# Altium PCB PCB2.PcbDoc
Units mil, origin at the board's own origin, x right, y up, seen from the top; angles counter-clockwise.
Board outline 6000 x 4000 mil, 2 copper layers (Top Layer, Bottom Layer); 51 components, 51 nets, 248 pads, 14 vias.
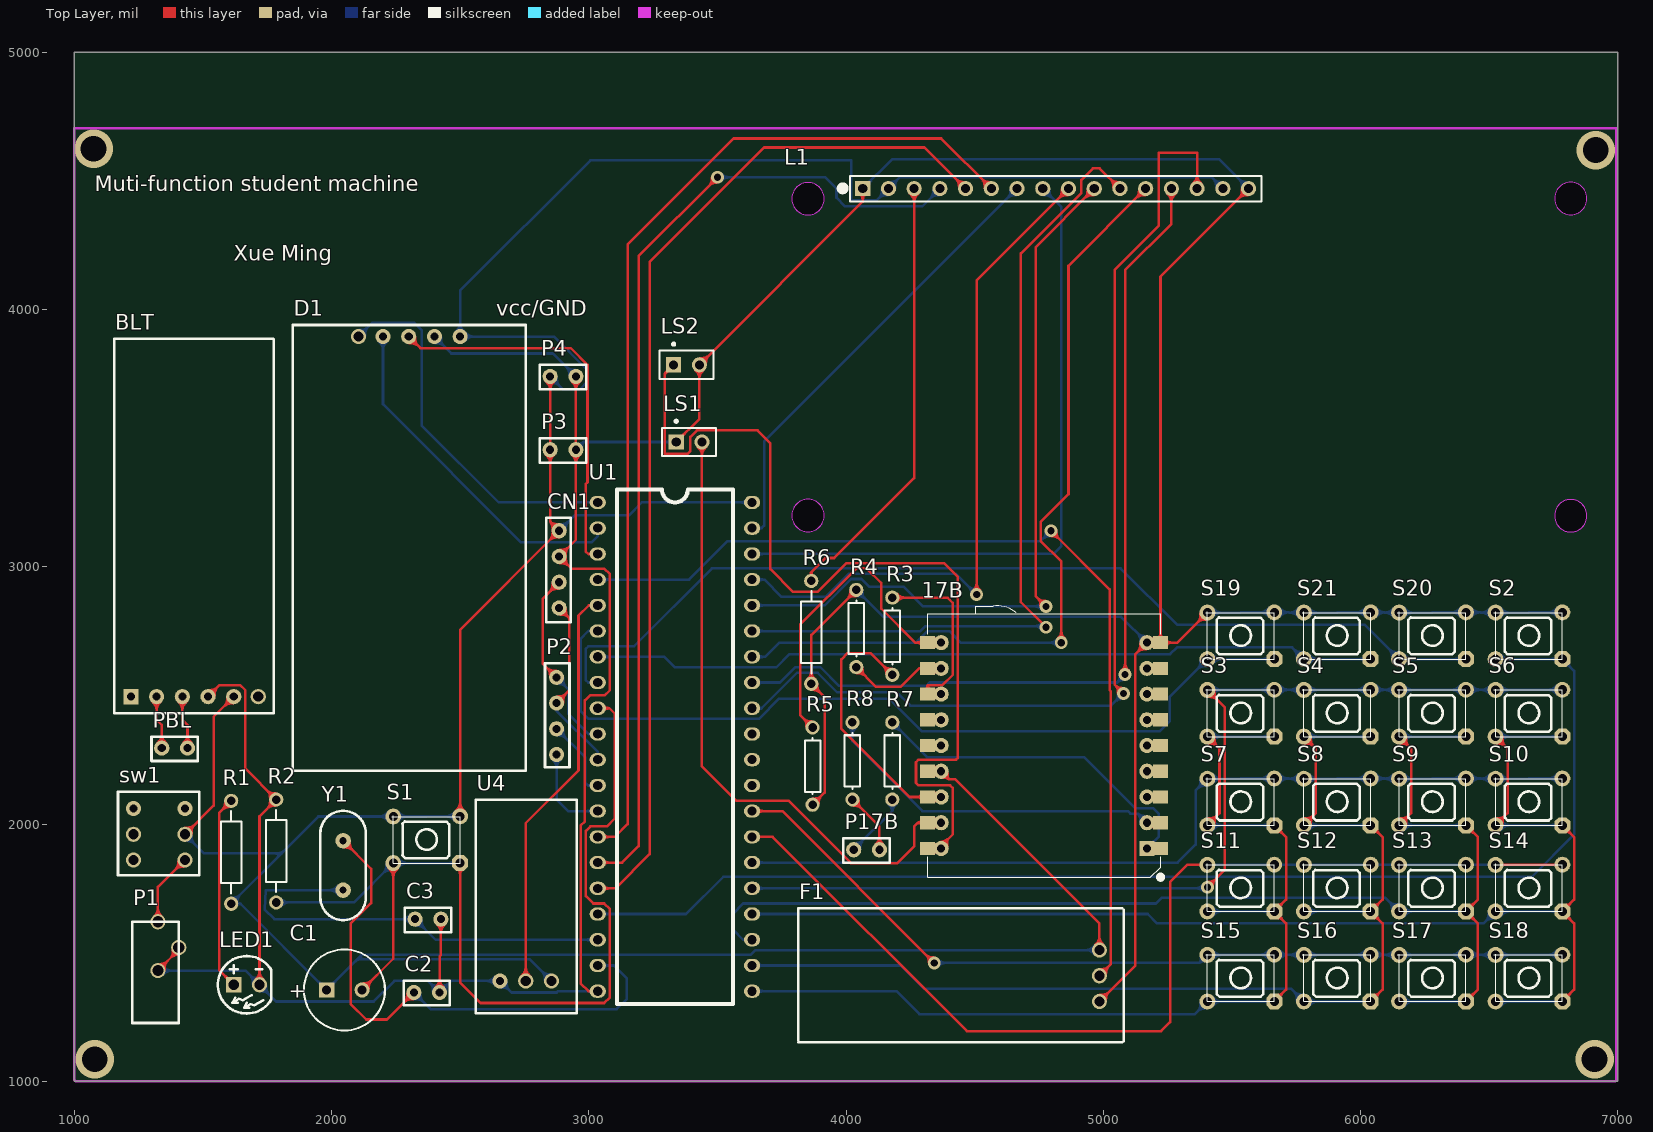
[diagram p0: Top Layer view]
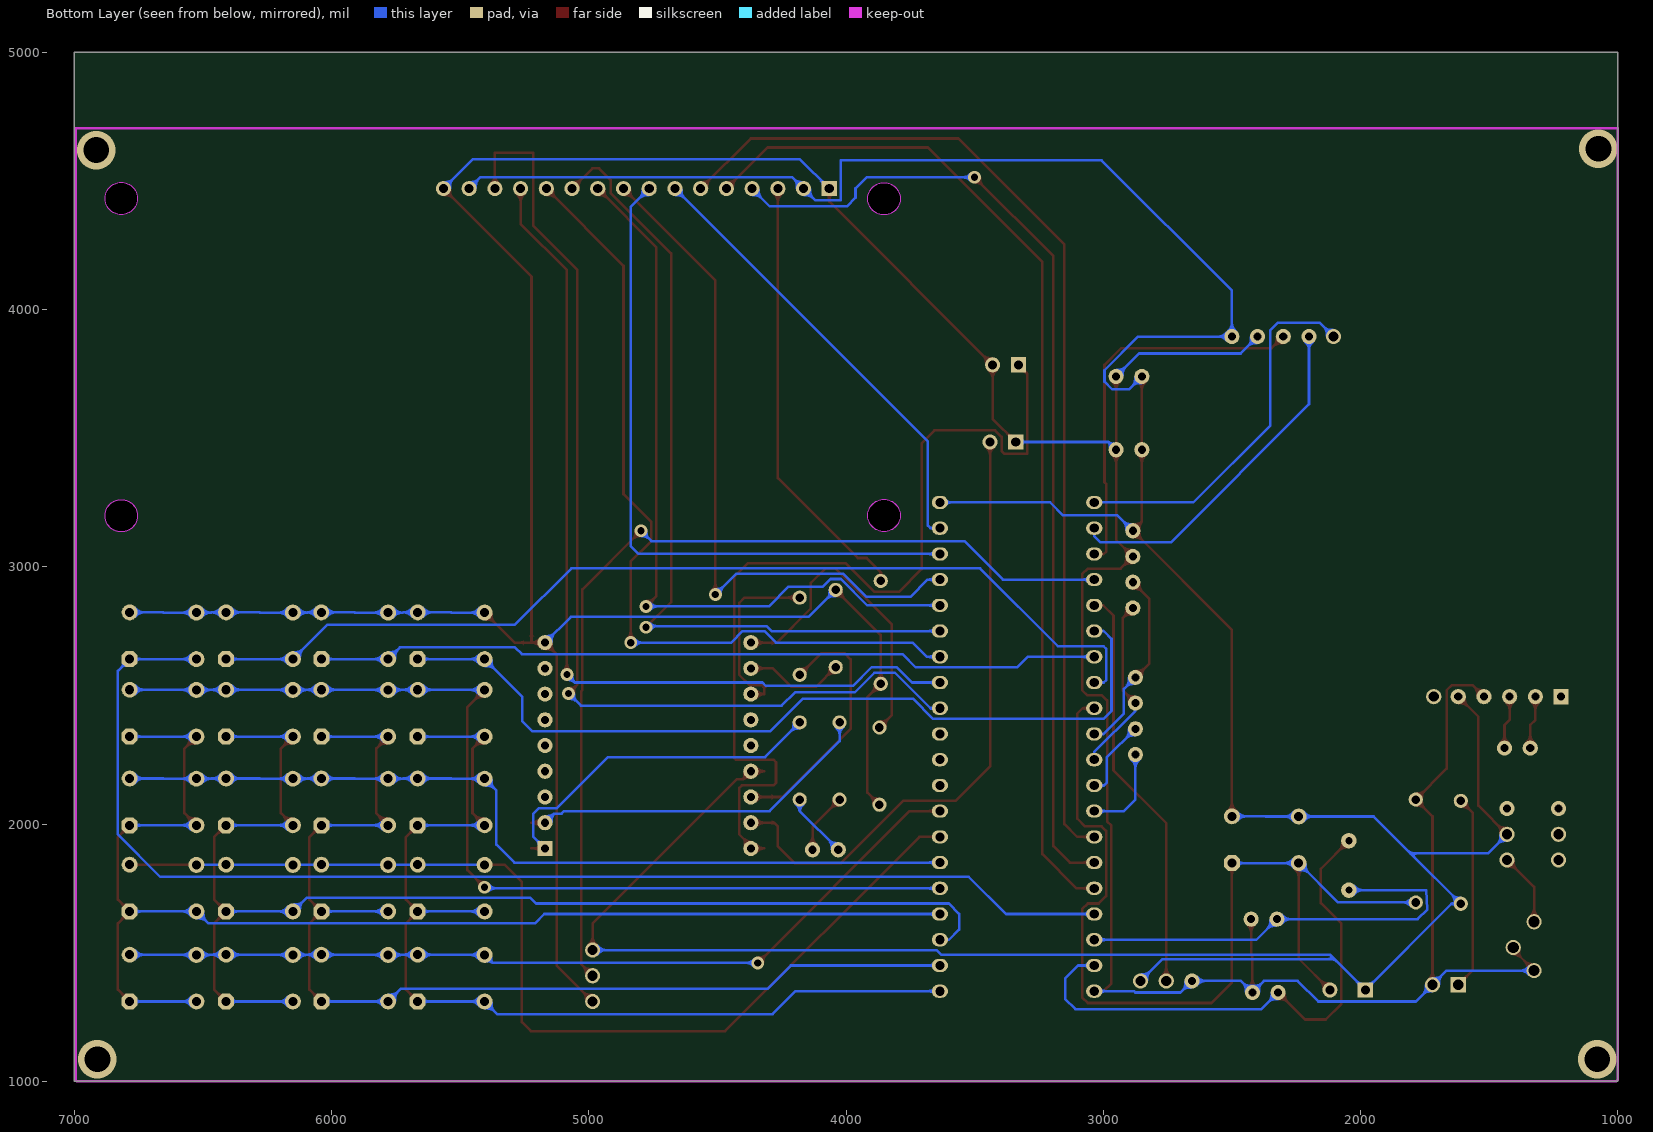
[diagram p1: Bottom Layer view, seen from below]

## Layer stack, top to bottom
Top Solder: solder mask 0.4, Solder Resist, Dk 3.5
Top Layer: signal copper 1.4
Dielectric 1: dielectric 12.6, FR-4, Dk 4.8
Bottom Layer: signal copper 1.4
Bottom Solder: solder mask 0.4, Solder Resist, Dk 3.5

## Board outline
1000,1000 7000,1000 7000,5000 1000,5000

## Design rules (kind name [scope] priority, off if disabled: settings)
Clearance [All] p1: gap=10 ignorepadtopadclearanceinfootprint=FALSE except(0: Arc-Hole Track-Hole SMDPad-Hole THPad-Hole Via-Hole Fill-Hole Poly-Hole Region-Hole Text-Hole)
PolygonConnect [All] p1: connectstyle=Relief reliefconductorwidth=10 reliefentries=4 polygonreliefangle="90 Angle" airgapwidth=10
RoutingVias [All] p1: holewidth=28 width=50 viastyle="Through Hole" minholewidth=28 minwidth=50 maxholewidth=28 maxwidth=50
SolderMaskExpansion [All] p1: expansion=4
Width [All] p1: maxlimit=10 minlimit=10 preferedwidth=10
30 further rules are at their usual default settings.

## Components (designator, comment, footprint, x,y, rotation, side; value= is the part's Value field where it differs from the comment)
17B "XY-V17B" 17B 5244.25,1776.81 r180 top
BLT "" BLE 1235,2495 r90 top
C1 "10uF" CAPPR3.5-8X12 2050,1355 r0 top
C2 "20pF" P4 2285,1345 r90 top value=104
C3 "20pF" P4 2290,1630 r90 top value=104
CN1 "4pin/2.54mm" CN1 2885,3180 r0 top
D1 "DS1302" DS1302 2755,3940 r270 top
F1 "蜂鸣器模块" BEEP 5024.25,1206.81 r180 top
L1 "LCD1602" LCD1602 4815,4470 r180 top
LED1 "直径5mm的红灯" LED_#5_Red 1670,1375 r0 top value=红灯
LS1 "Bell" PIN2 3340,3485 r0 top
LS2 "Bell" PIN2 3330,3785 r0 top
P1 "电源输入" POWER111 1225,1620 r0 top
P2 "10到13触角" CN1 2875,2230 r180 top
P3 "" P4 2815,3455 r90 top
P4 "" P4 2815,3740 r90 top
P17B "" P4 3995,1900 r90 top
PBL "" P4 1305,2295 r90 top
R1 "" AXIAL-0.4 1610,1890 r90 top value=510
R2 "" AXIAL-0.4 1785,1895 r90 top value=10K
R3 "" AXIAL-0.3 4180,2730 r270 top value=10K
R4 "" AXIAL-0.3 4040,2760 r90 top value=10K
R5 "" AXIAL-0.3 3870,2225 r270 top value=10K
R6 "" AXIAL-0.4 3865,2745 r90 top value=2K
R7 "" AXIAL-0.3 4180,2245 r90 top value=1K
R8 "" AXIAL-0.3 4025,2245 r90 top value=1K
S1 "SW-PB" KEY2 2370,1940 r0 top
S2 "SW-PB" KEY2 6655,2732.9 r0 top
S3 "SW-PB" KEY2 5535,2432 r0 top
S4 "SW-PB" KEY2 5909.91,2432 r0 top
S5 "SW-PB" KEY2 6280,2432 r0 top
S6 "SW-PB" KEY2 6655,2432 r0 top
S7 "SW-PB" KEY2 5535,2087 r0 top
S8 "SW-PB" KEY2 5909.91,2087 r0 top
S9 "SW-PB" KEY2 6280,2087 r0 top
S10 "SW-PB" KEY2 6655,2087 r0 top
S11 "SW-PB" KEY2 5535,1752 r0 top
S12 "SW-PB" KEY2 5909.91,1752 r0 top
S13 "SW-PB" KEY2 6280,1752 r0 top
S14 "SW-PB" KEY2 6655,1752 r0 top
S15 "SW-PB" KEY2 5535,1402 r0 top
S16 "SW-PB" KEY2 5909.91,1402 r0 top
S17 "SW-PB" KEY2 6280,1402 r0 top
S18 "SW-PB" KEY2 6655,1402 r0 top
S19 "SW-PB" KEY2 5535,2732.9 r0 top
S20 "SW-PB" KEY2 6280,2732.9 r0 top
S21 "SW-PB" KEY2 5909.91,2732.9 r0 top
sw1 "电源开关" 电源 1090,2115 r0 top
U1 "STC89C52_DIP" DIP-40 3035,3250 r270 top
U4 "DS18B20" DS18B20 2560,1265 r90 top
Y1 "12M" XTAL-49/U_N 2045,1743 r90 top

## Footprints (in the part's own frame and the unit in brackets; to place one, negate y for a bottom-side part, rotate by r counter-clockwise, add the part's x,y. Pads: shape width x height; smd on the part's side, far side on the other; paste and mask are expansions set on the pad)
17B [mm]
  rect 1.5x1.3 smd: 1(0.546,-3.256) 2(0.546,-5.796) 3(0.546,-8.336) 4(0.546,-10.876) 5(0.546,-13.416) 6(0.546,-15.956) 7(0.546,-18.496) 8(0.546,-21.036) 9(0.546,-23.576) 10(23.546,-23.576) 11(23.546,-21.036) 12(23.546,-18.496) 13(23.546,-15.956) 14(23.546,-13.416) 15(23.546,-10.876) 16(23.546,-8.336) 17(23.546,-5.796) 18(23.546,-3.256)
  rect 1.5x1.5 hole 0.8: 1(1.886,-3.256)
  round 1.5 hole 0.8: 2(1.886,-5.796) 3(1.886,-8.336) 4(1.886,-10.876) 5(1.886,-13.416) 6(1.886,-15.956) 7(1.886,-18.496) 8(1.886,-21.036) 9(1.886,-23.576) 10(22.206,-23.576) 11(22.206,-21.036) 12(22.206,-18.496) 13(22.206,-15.956) 14(22.206,-13.416) 15(22.206,-10.876) 16(22.206,-8.336) 17(22.206,-5.796) 18(22.206,-3.256)
  silkscreen extent 0.35,-27.21 23.55,-0.22
AXIAL-0.3 [mm] "Axial Device, Thru-Hole; 2 Leads; 0.3 in Pin Spacing"
  round 1.4 hole 0.85: 1(-3.81,0) 2(3.81,0)
  silkscreen extent -2.77,-0.76 2.77,0.76
AXIAL-0.4 [mm] "Axial Device, Thru-Hole; 2 Leads; 0.4 in Pin Spacing"
  round 1.4 hole 0.85: 1(-5.08,0) 2(5.08,0)
  silkscreen extent -4.06,-1.02 4.06,1.02
BEEP [mm]
  round 1.5 hole 1: 1(0.997,-2.621) 2(0.997,-5.161) 3(0.997,-7.701)
  silkscreen extent -1.4,-11.81 30.73,1.4
BLE [mm]
  rect 1.5x1.5 hole 0.8: 1(0,0.381)
  round 1.5 hole 0.8: 2(0,-2.159) 3(0,-4.699) 4(0,-7.239) 5(0,-9.779)
  round 1.5 hole 1: 6(0,-12.192)
  silkscreen extent -1.65,-13.72 35.35,2.03
CAPPR3.5-8X12 [mm]
  rect 1.5x1.5 hole 0.9: 1(-1.75,0)
  round 1.5 hole 0.9: 2(1.75,0)
  silkscreen extent -4,-4 4,4, body extent -4.04,-4.04 4.04,4.04, height 12
CN1 [mm]
  round 1.5 hole 0.8: 2(0,-1.016) 3(0,-3.556) 4(0,-6.096) 5(0,-8.636)
  silkscreen extent -1.27,-10.03 1.14,0.25
DIP-40 [mm] "40脚直插芯片 间距2.54mm 600mil"
  oval 1.3x1.6 hole 0.9: 1(0,0) 2(2.54,0) 3(5.08,0) 4(7.62,0) 5(10.16,0) 6(12.7,0) 7(15.24,0) 8(17.78,0) 9(20.32,0) 10(22.86,0) 11(25.4,0) 12(27.94,0) 13(30.48,0) 14(33.02,0) 15(35.56,0) 16(38.1,0) 17(40.64,0) 18(43.18,0) 19(45.72,0) 20(48.26,0) 21(48.26,15.24) 22(45.72,15.24) 23(43.18,15.24) 24(40.64,15.24) 25(38.1,15.24) 26(35.56,15.24) 27(33.02,15.24) 28(30.48,15.24) 29(27.94,15.24) 30(25.4,15.24) 31(22.86,15.24) 32(20.32,15.24) 33(17.78,15.24) 34(15.24,15.24) 35(12.7,15.24) 36(10.16,15.24) 37(7.62,15.24) 38(5.08,15.24) 39(2.54,15.24) 40(0,15.24)
  silkscreen extent -1.27,1.9 49.53,13.34, body extent -1.22,-1.18 49.48,16.42, height 8.5
DS18B20 [mm]
  round 1.5 hole 0.8: 2(3.175,-2.413)
  round 1.5 hole 1: 3(3.175,-4.953) 4(3.175,-7.493)
  silkscreen extent 0,-10 21.08,0
DS1302 [mm]
  round 1.5 hole 0.8: 2(1.143,-6.477) 3(1.143,-9.017) 4(1.143,-11.557) 5(1.143,-14.097)
  round 1.5 hole 1: 6(1.143,-16.51)
  silkscreen extent 0,-23 44,0
KEY2 [mil]
  round 62 hole 35: 1(-130,-92) 2(-129.91,89.1) 2(129.84,89.89)
  oct 62x62 hole 35: 1(129.93,-92)
  silkscreen extent -136,-92 130,93
LCD1602 [mm] "LCD1602"
  rect 1.5x1.5 hole 0.9: 1(19.05,0)
  round 1.5 hole 0.9: 2(16.51,0) 3(13.97,0) 4(11.43,0) 5(8.89,0) 6(6.35,0) 7(3.81,0) 8(1.27,0) 9(-1.27,0) 10(-3.81,0) 11(-6.35,0) 12(-8.89,0) 13(-11.43,0) 14(-13.97,0) 15(-16.51,0) 16(-19.05,0)
  Keep-Out Layer circle w0.1: c24.451,32.274 r1.6
  Keep-Out Layer circle w0.1: c24.451,1 r1.6
  Keep-Out Layer circle w0.1: c-50.867,0.974 r1.6
  Keep-Out Layer circle w0.1: c-50.867,32.3 r1.6
  Keep-Out Layer board cut-out: 22.851,32.274 22.973,31.662 23.32,31.143 23.839,30.796 24.451,30.674 24.451,30.674 25.063,30.796 25.582,31.143 25.929,31.662 26.051,32.274 26.051,32.274 25.929,32.886 25.582,33.406 25.063,33.752 24.451,33.874 24.451,33.874 23.839,33.752 23.32,33.406 22.973,32.886 22.851,32.274
  Keep-Out Layer board cut-out: 22.851,1 22.973,0.388 23.32,-0.132 23.839,-0.478 24.451,-0.6 24.451,-0.6 25.063,-0.478 25.582,-0.132 25.929,0.388 26.051,1 26.051,1 25.929,1.612 25.582,2.131 25.063,2.478 24.451,2.6 24.451,2.6 23.839,2.478 23.32,2.131 22.973,1.612 22.851,1
  Keep-Out Layer board cut-out: -52.467,0.974 -52.345,0.362 -51.998,-0.157 -51.479,-0.504 -50.867,-0.626 -50.867,-0.626 -50.255,-0.504 -49.736,-0.157 -49.389,0.362 -49.267,0.974 -49.267,0.974 -49.389,1.587 -49.736,2.106 -50.255,2.453 -50.867,2.574 -50.867,2.574 -51.479,2.453 -51.998,2.106 -52.345,1.587 -52.467,0.974
  Keep-Out Layer board cut-out: -52.467,32.3 -52.345,31.687 -51.998,31.168 -51.479,30.821 -50.867,30.7 -50.867,30.7 -50.255,30.821 -49.736,31.168 -49.389,31.687 -49.267,32.3 -49.267,32.3 -49.389,32.912 -49.736,33.431 -50.255,33.778 -50.867,33.9 -50.867,33.9 -51.479,33.778 -51.998,33.431 -52.345,32.912 -52.467,32.3
  silkscreen extent -20.32,-1.27 21.47,1.27, body extent -53.46,-1.61 27.04,34.89, height 10.52
LED_#5_Red [mm] "直径5MM的红灯"
  rect 1.5x1.5 hole 1: 1(-1.27,0)
  round 1.5 hole 1: 2(1.27,0)
  silkscreen extent -2.84,-2.84 2.44,2.84, body extent -2.86,-2.85 2.49,2.85, height 8.6
P4 [mm]
  round 1.5 hole 0.8: 4(0,-0.889) 5(0,-3.429)
  silkscreen extent -1.27,-4.44 1.14,0.13
PIN2 [mm] "Photosensitive Diode; 2 Leads"
  rect 1.5x1.5 hole 0.9: 1(0,0)
  round 1.5 hole 0.9: 2(2.54,0)
  silkscreen extent -1.4,-1.4 3.94,2.17
POWER111 [mm]
  round 1.5 hole 1.1: 1(2.54,0) 2(4.6,-2.54) 3(2.54,-4.826)
  silkscreen extent 0,-10.01 4.6,0
XTAL-49/U_N [mil] "高型晶振（未加焊）"
  round 60 hole 28: 1(0,0) 2(192,0)
  silkscreen extent -116,-88 308,89, body extent -117,-88 309,89, height 512
电源 [mm]
  round 1.5 hole 0.8: 1(3.556,-1.397) 2(8.636,-1.397)
  round 1.5 hole 1: 3(3.556,-3.937) 4(8.636,-3.937) 5(3.556,-6.477) 6(8.636,-6.477)
  silkscreen extent 2.03,-8 10.03,0.25

## Part data
17B: library part MODULE
BLT: library part lanya
C1: library part "Cap Pol1", "Polarized Capacitor (Radial)", LatestRevisionDate=17-Jul-2002, LatestRevisionNote="Re-released for DXP Platform.", PackageReference=RB7.6-15, Published=8-Jun-2000, Publisher="Altium Limited"
C2 C3: library part Cap_0603, "0603贴片电容", Package=0603, 常见贴片电容尺寸图=https://wenku.baidu.com/view/21d5206100f69e3143323968011ca300a6c3f6b2.html
CN1 P2: library part MHDR1X4, "Header, 4-Pin", LatestRevisionDate=17-Jul-2002, LatestRevisionNote="Re-released for DXP Platform.", Publisher="Altium Limited"
F1: library part fengmingqi
LED1: library part LED_5#红灯, "直径5mm的发光二极管"
LS1 LS2: "Electrical Bell", LatestRevisionDate=17-Jul-2002, LatestRevisionNote="Re-released for DXP Platform.", PackageReference=PIN2, Published=24-Mar-1999, Publisher="Altium Limited"
P1: library part POWER
P3 P4 P17B PBL: library part "Header 2", "Header, 2-Pin", LatestRevisionDate=17-Jul-2002, LatestRevisionNote="Re-released for DXP Platform.", Publisher="Altium Limited"
R1 R2 R6: library part Res2, "Resistor", LatestRevisionDate=17-Jul-2002, LatestRevisionNote="Re-released for DXP Platform.", PackageDescription="Axial Device, Thru-Hole; 2 Leads; 0.4 in Pin Spacing", PackageReference=AXIAL-0.4, Published=8-Jun-2000, Publisher="Altium Limited"
R3 R4 R5 R7 R8: library part Res1, "Resistor", LatestRevisionDate=17-Jul-2002, LatestRevisionNote="Re-released for DXP Platform.", PackageDescription="Axial Device, Thru-Hole; 2 Leads; 0.3 in Pin Spacing", PackageReference=AXIAL-0.3, Published=8-Jun-2000, Publisher="Altium Limited"
S1 S2 S3 S4 S5 S6 S7 S8 S9 S10 S11 S12 S13 S14 S15 S16 S17 S18 S19 S20 S21: "Switch", LatestRevisionDate=17-Jul-2002, LatestRevisionNote="Re-released for DXP Platform.", PackageReference=SPST-2, Published=24-Mar-1999, Publisher="Altium Limited"
sw1: library part "Header 3X2", "Header, 3-Pin, Dual row", LatestRevisionDate=17-Jul-2002, LatestRevisionNote="Re-released for DXP Platform.", Publisher="Altium Limited"
Y1: library part 16M, "Crystal Oscillator"

## Via types
v1: diameter 50, hole 28, Top Layer to Bottom Layer, 10 vias
v2: diameter 150, hole 100, Top Layer to Bottom Layer, 4 vias

## Nets (pads, with @x,y where several pads share a name; then routed paths per layer and width w, separated by ;. In a path a pad name is that pad's centre, name@x,y a point inside that pad or via, vN(x,y) a via of type N, cw(c..) or ccw(c..) an arc to the next point about the centre after c; other vN are vias at no path point)
3.3V: 17B.16 R3.2 | length 1010.5
  Top Layer w10: R3.2 4096,2664 4006,2664 3982,2640 3982,2370 4247,2105 4317.24,2105 17B.16@4370,2105
GND: 17B.9 BLT.4 C2.5 C3.5 CN1.3 D1.3 F1.1 L1.1 L1.16 LED1.2 LS1.1 LS2.2 P1.2 P1.3 P3.5 P4.5 R2.2 R4.2 R5.2 R6.1 S2.2 S19.2 S20.2 S21.2 U1.20 U4.2 | length 17462.5
  Top Layer w10: P1.3 1406.1,1511.1 P1.2 ; BLT.4 1565,2540 1645,2540 1665,2520 1665,2215 R2.2 1720,2030 LED1.2 ; C2.5 2420,1485 2425,1490 C3.5 ; P4.5 P3.5 2950,3105 CN1.3 2932,2993 3060,2993 3082,2971 3082,2520 3062,2500 3005,2500 2985,2480 2985,2010.59 2968.5,1994.09 2968.5,1380 2998.5,1350 U1.20 ; LS1.1 3430,3575 LS2.2 4065,4420 L1.1 ; R5.2 3917,2122 3917,2493 R6.1 3865,2735 R4.2 ; F1.1 5125,1450 5125,2660 5170,2705 17B.9@5222.76,2705 ; S19.2@5405.09,2822 5288.08,2705 17B.9@5222.76,2705 ; L1.16 5222.76,4127.76 17B.9@5222.76,2705
  Bottom Layer w10: P1.3 1665,1430 LED1.2 1785,1310 2164,1310 2244,1390 2375,1390 C2.5 2465,1390 U4.2 2700,1345 2875,1345 2880,1350 U1.20 ; D1.3 2466,3829 2861,3829 P4.5 ; P3.5 2980,3485 LS1.1 ; R4.2 4144.96,2805.04 5069.96,2805.04 17B.9@5170,2705 ; L1.1 4180,4585 5450,4585 L1.16 ; S19.2@5405.09,2822 5534,2822 5534.79,2822.79 5664.84,2822.79 5722,2822.79 5722.79,2822 5780,2822 5909,2822 5909.79,2822.79 6039.76,2822.79 6094,2822.79 6094.79,2822 6150.09,2822 6279,2822 6279.79,2822.79 6409.84,2822.79 6467,2822.79 6467.79,2822 6525.09,2822 6654,2822 6654.79,2822.79 S2.2@6784.84,2822.79
INT0: P2.3 U1.12 | length 308.5
  Bottom Layer w10: P2.3 2987,2258 2987,2160 2997,2150 U1.12
INT1: P2.2 U1.13 | length 353.6
  Bottom Layer w10: P2.2 2875,2095 2920,2050 U1.13
LCDEN: L1.6 U1.14 | length 4055.1
  Top Layer w10: U1.14 3101,1950 3151,2000 3151,4253 3563,4665 4370,4665 L1.6
Net17B_1: 17B.1 R7.2 | length 1388.4
  Top Layer w10: 17B.1@5170,1905 17B.1@5222.76,1905
  Bottom Layer w10: R7.2 4315,2260 4925.47,2260 5125,2060.47 5194.53,2060.47 5215,2040 5215,1950 17B.1@5170,1905
Net17B_2: 17B.2 R8.2 | length 1402.1
  Top Layer w10: 17B.2@5170,2005 17B.2@5222.76,2005
  Bottom Layer w10: R8.2 4025,2322 4297,2050 5095.94,2050 5105.47,2040.47 5134.53,2040.47 17B.2@5170,2005
Net17B_10: 17B.10 R5.1 | length 1237.5
  Top Layer w10: R5.1 3822,2423 3822,2776 4040,2994 4080,2994 4137,2937 4137,2837 4269,2705 4317.24,2705 17B.10@4370,2705
Net17B_11: 17B.11 R4.1 | length 391.7
  Top Layer w10: R4.1 4117,2533 4212,2533 4284,2605 4317.24,2605 17B.11@4370,2605
Net17B_12: 17B.12 R3.1 | length 725.4
  Top Layer w10: R3.1 4395,2880 4415,2860 4415,2580 4375,2540 4317.24,2540 4317.24,2505 17B.12@4370,2505
Net17B_17: 17B.17 LS1.2 | length 2456.9
  Top Layer w10: LS1.2 3440,2224 3573,2091 3776,2091 4019,1848 4200,1848 4265,1913 4265,1990 4280,2005 4317.24,2005 17B.17@4370,2005
Net17B_18: 17B.18 LS2.1 | length 3598.8
  Top Layer w10: LS2.1 3295,3750 3295,3440 3385,3440 3395,3450 3395,3505 3420,3530 3656,3530 3706,3480 3706,2991 3794.56,2902.44 3890,2902.44 4001.56,3014 4381,3014 4435,2960 4435,2257 4428,2250 4282,2250 4272,2240 4272,2160 4282,2150 4405,2150 4415,2140 4415,1960 17B.18@4360,1905 ; 17B.18@4317.24,1905 17B.18@4360,1905 ; 17B.18@4370,1905 17B.18@4360,1905
NetBLT_2: BLT.2 PBL.4 | length 208.3
  Top Layer w10: BLT.2 1320,2405 1340,2385 PBL.4
NetBLT_3: BLT.3 PBL.5 | length 208.3
  Top Layer w10: BLT.3 1420,2405 1440,2385 PBL.5
NetC1_2: C1.2 R2.1 S1.1 U1.9 | length 3736.3
  Top Layer w10: C1.2 2240,1476.1 S1.1@2240,1848 ; S1.1@2499.93,1848 2499.93,1383.07 2579,1304 3060,1304 3082,1326 3082,1669 3060,1691 3017.5,1691 2988.5,1720 2988.5,1973.5 3006,1991 3071,1991 3101,2021 3101,2429 3080,2450 U1.9
  Bottom Layer w10: R2.1 2087,1695 2240,1848 2369,1848 S1.1@2499.93,1848
NetC2_2: C3.4 U1.18 Y1.1 | length 1719
  Bottom Layer w10: Y1.1 1745,1743 1740,1668 1778,1630 C3.4 2405,1550 U1.18
NetC3_2: C2.4 U1.19 Y1.2 | length 2112.2
  Top Layer w10: Y1.2 2154,1826 2154,1693 2074,1613 2074,1301 2135,1240 2215,1240 C2.4
  Bottom Layer w10: C2.4 2385,1280 3108,1280 3148,1320 3148,1400 3098,1450 U1.19
NetL1_3: L1.3 R6.2 | length 1710.6
  Top Layer w10: R6.2 3865,2979 3920,3034 3954,3034 4265,3345 L1.3
NetL1_7: L1.7 U1.39 | length 1768.3
  Bottom Layer w10: U1.39 3672,3150 3682,3160 3682,3487 L1.7
NetL1_8: L1.8 U1.38 | length 2634.2
  Bottom Layer w10: U1.38 4807,3050 4837,3080 4837,4398 L1.8
NetL1_9: L1.9 U1.37 | length 2697.1
  Top Layer w10: v1(4508,2892) 4508,4113 L1.9
  Bottom Layer w10: U1.37 3683,2950 3750,2883 3921,2883 4010.56,2972.56 4427.44,2972.56 v1(4508,2892)
NetL1_10: L1.10 U1.36 | length 2963.6
  Top Layer w10: v1(4777,2846) 4737,2886 4737,4242 L1.10
  Bottom Layer w10: U1.36 3917.44,2850 4020,2952.56 4060,2952.56 4089.56,2923 4223,2923 4300,2846 v1(4777,2846)
NetL1_11: L1.11 U1.35 | length 3229.8
  Top Layer w10: v1(4777,2765) 4680,2862 4680,4218 4915,4453 4915,4504 4960,4549 4986,4549 L1.11
  Bottom Layer w10: U1.35 4289,2750 4308.53,2769.53 4772.47,2769.53 v1(4777,2765)
NetL1_12: L1.12 U1.34 | length 3228.8
  Top Layer w10: v1(4837,2705) 4837,3020 4757,3100 4757,3174 4865,3282 4865,4170 L1.12
  Bottom Layer w10: U1.34 3686,2650 3741,2705 4272.47,2705 4317,2749.53 4401.47,2749.53 4446,2705 v1(4837,2705)
NetL1_13: L1.13 U1.33 | length 3487
  Top Layer w10: v1(5085,2581) 5085,4153 5265,4333 L1.13
  Bottom Layer w10: U1.33 3743,2550 3803.12,2610.12 3899.88,2610.12 3973,2537 4312,2537 4325,2550 5054,2550 v1(5085,2581)
NetL1_14: L1.14 U1.32 | length 4050.1
  Top Layer w10: v1(5078.5,2507.5) 5045,2541 5045,4155 5215,4325 5215,4610 5365,4610 L1.14
  Bottom Layer w10: U1.32 3672,2450 3810,2588 3890,2588 3966,2512 4198,2512 4250,2460 5031,2460 v1(5078.5,2507.5)
NetLED1_1: LED1.1 R1.2 | length 758.1
  Top Layer w10: R1.2 1563,2043 1563,1432 LED1.1
NetP1_1: P1.1 sw1.6 | length 283.5
  Top Layer w10: P1.1 1325,1755 sw1.6
P10: D1.6 U1.1 | length 1458.6
  Bottom Layer w10: D1.6 2159,3949 2321,3949 2350,3920 2350,3550 2650,3250 U1.1
P11: D1.5 U1.2 | length 1360.8
  Bottom Layer w10: D1.5 2200,3632 2737,3095 3010,3095 3035,3120 U1.2
P12: D1.4 U1.3 | length 1519.6
  Top Layer w10: D1.4 2345,3850 2930,3850 2995,3785 2995,3328 2988,3321 2988,3060 2998,3050 U1.3
P13: F1.2 U1.4 | length 3685.9
  Top Layer w10: v1(4797,3140) 5025,2912 5025,2521 5030,2516 5030,1455 F1.2
  Bottom Layer w10: U1.4 3390,2950 3540,3100 4757,3100 v1(4797,3140)
P14: U1.5 U4.3 | length 1596.5
  Top Layer w10: U4.3 2755,2003 2960,2208 2960,2810 3000,2850 U1.5
P15: S19.1 U1.6 | length 3326.1
  Bottom Layer w10: U1.6 2998,2750 2968,2720 2968,2440 2999,2409 3661,2409 3739,2487 4168,2487 4295,2360 5219,2360 5259,2400 5259,2494.9 5405,2640.9 5534,2640.9 S19.1@5664.93,2640.9
P16: S21.1 U1.7 | length 3073.2
  Bottom Layer w10: U1.7 3294,2650 3335,2609 3728.91,2609 3779.91,2660 5260,2660 5287,2687 5733.82,2687 5779.92,2640.9 5909,2640.9 S21.1@6039.84,2640.9
P17: S20.1 U1.8 | length 3869.4
  Bottom Layer w10: U1.8 2998,2550 2988,2560 2988,2680 2999,2691 3176,2691 3479,2994 5068,2994 5287,2775 6015.9,2775 6150,2640.9 6279,2640.9 S20.1@6409.93,2640.9
P21: S3.1 S7.1 S11.1 S15.1 U1.21 | length 4012.2
  Top Layer w10: S7.1@5405,1995 5452,2042 5452,2293 S3.1@5405,2340 ; S15.1@5664.93,1310 5711,1356.07 5711,1613.93 5664.93,1660 5711,1706.07 5711,1948.93 S7.1@5664.93,1995
  Bottom Layer w10: U1.21 4196,1350 4285,1261 5356,1261 5405,1310 5534,1310 S15.1@5664.93,1310 ; S11.1@5405,1660 5534,1660 S11.1@5664.93,1660 ; S7.1@5405,1995 5534,1995 S7.1@5664.93,1995 ; S3.1@5405,2340 5534,2340 S3.1@5664.93,2340
P22: S4.1 S8.1 S12.1 S16.1 U1.22 | length 4387.3
  Top Layer w10: S8.1@5779.92,1995 5826,2041.09 5826,2293.92 S4.1@5779.92,2340 ; S16.1@6039.84,1310 6086,1356.16 6086,1613.84 6039.84,1660 6086,1706.16 6086,1948.84 S8.1@6039.84,1995
  Bottom Layer w10: U1.22 4214,1450 4304,1360 5729.92,1360 5779.92,1310 5909,1310 S16.1@6039.84,1310 ; S12.1@5779.92,1660 5909,1660 S12.1@6039.84,1660 ; S8.1@5779.92,1995 5909,1995 S8.1@6039.84,1995 ; S4.1@5779.92,2340 5909,2340 S4.1@6039.84,2340
P23: S5.1 S9.1 S13.1 S17.1 U1.23 | length 4975.2
  Top Layer w10: S9.1@6150,1995 6197,2042 6197,2293 S5.1@6150,2340 ; S17.1@6409.93,1310 6456,1356.07 6456,1613.93 6409.93,1660 6456,1706.07 6456,1948.93 S9.1@6409.93,1995
  Bottom Layer w10: U1.23 3600,1550 3560,1590 3560,1651 3600,1691 5205,1691 5227,1713 6097,1713 6150,1660 6279,1660 S13.1@6409.93,1660 ; S17.1@6150,1310 6279,1310 S17.1@6409.93,1310 ; S9.1@6150,1995 6279,1995 S9.1@6409.93,1995 ; S5.1@6150,2340 6279,2340 S5.1@6409.93,2340
P24: S6.1 S10.1 S14.1 S18.1 U1.24 | length 5109
  Top Layer w10: S10.1@6525,1995 6572,2042 6572,2293 S6.1@6525,2340 ; S18.1@6784.93,1310 6831,1356.07 6831,1613.93 6784.93,1660 6831,1706.07 6831,1948.93 S10.1@6784.93,1995
  Bottom Layer w10: U1.24 5173,1650 5209,1614 6479,1614 6525,1660 6654,1660 S14.1@6784.93,1660 ; S18.1@6525,1310 6654,1310 S18.1@6784.93,1310 ; S10.1@6525,1995 6654,1995 S10.1@6784.93,1995 ; S6.1@6525,2340 6654,2340 S6.1@6784.93,2340
P25: S3.2 S4.2 S5.2 S6.2 U1.25 | length 3976.3
  Top Layer w10: v1(5405,1754) 5472,1821 5472,2454.19 S3.2@5405.09,2521.11
  Bottom Layer w10: U1.25 5401,1750 v1(5405,1754) ; S3.2@5405.09,2521.11 5534,2521.11 5534.79,2521.89 5664.84,2521.89 5722,2521.89 5722.79,2521.11 5780,2521.11 5909,2521.11 5909.79,2521.89 6039.76,2521.89 6094,2521.89 6094.79,2521.11 6150.09,2521.11 6279,2521.11 6279.79,2521.89 6409.84,2521.89 6467,2521.89 6467.79,2521.11 6525.09,2521.11 6654,2521.11 6654.79,2521.89 S6.2@6784.84,2521.89
P26: S7.2 S8.2 S9.2 S10.2 U1.26 | length 3410.2
  Bottom Layer w10: U1.26 5289,1850 5359,1920 5359,2130.02 5405.09,2176.11 5534,2176.11 5534.79,2176.89 5664.84,2176.89 5722,2176.89 5722.79,2176.11 5780,2176.11 5909,2176.11 5909.79,2176.89 6039.76,2176.89 6094,2176.89 6094.79,2176.11 6150.09,2176.11 6279,2176.11 6279.79,2176.89 6409.84,2176.89 6467,2176.89 6467.79,2176.11 6525.09,2176.11 6654,2176.11 6654.79,2176.89 S10.2@6784.84,2176.89
P28: S15.2 S16.2 S17.2 S18.2 U1.28 | length 3409.4
  Top Layer w10: U1.28 3753,2050 v1(4343,1460)
  Bottom Layer w10: v1(4343,1460) 5373.98,1460 5405.09,1491.11 5534,1491.11 5534.79,1491.89 5664.84,1491.89 5722,1491.89 5722.79,1491.11 5780,1491.11 5909,1491.11 5909.79,1491.89 6039.76,1491.89 6094,1491.89 6094.79,1491.11 6150.09,1491.11 6279,1491.11 6279.79,1491.89 6409.84,1491.89 6467,1491.89 6467.79,1491.11 6525.09,1491.11 6654,1491.11 6654.79,1491.89 S18.2@6784.84,1491.89
P37: S2.1 U1.17 | length 4884.3
  Bottom Layer w10: U1.17 3378,1650 3523,1795 6666,1795 6831,1960 6831,2594.83 6784.93,2640.9 6654,2640.9 S2.1@6525,2640.9
RS: L1.4 U1.15 | length 3873.6
  Top Layer w10: U1.15 3130,1850 3194,1914 3194,4208 v1(3500,4514)
  Bottom Layer w10: v1(3500,4514) 3920,4514 3963.01,4470.99 3963.01,4434.73 3996.37,4401.37 4296.37,4401.37 L1.4
RX: P17B.5 R8.1 | length 238.5
  Top Layer w10: R8.1 4130,1990 P17B.5
RXD: CN1.4 P2.5 U1.10 | length 726.7
  Top Layer w10: P2.5 2820.47,2624.53 2820.47,2875.47 CN1.4
  Bottom Layer w10: P2.5 2920,2525 2920,2429 2999,2350 U1.10
TX: P17B.4 R7.1 | length 257.1
  Bottom Layer w10: P17B.4 4180,2050 R7.1
TXD: CN1.5 P2.4 U1.11 | length 692.7
  Top Layer w10: P2.4 2924,2519 2924,2801 CN1.5
  Bottom Layer w10: P2.4 2875,2440 3035,2280 U1.11
VCC: 17B.15 BLT.5 C1.1 CN1.2 D1.2 F1.3 L1.2 L1.15 P3.4 P4.4 R1.1 S1.2 sw1.4 U1.40 U4.4 | length 14449.9
  Top Layer w10: sw1.4 1542,2072 1542,2417 BLT.5 ; S1.2@2499.84,2029.89 2499.84,2754.84 CN1.2 2850,3175 P3.4 P4.4 ; 17B.15@4317.24,2205 4370,2205 4401.56,2173.44 4425,2173.44 4985,1613.44 F1.3
  Bottom Layer w10: sw1.4 1504,1886 1806,1886 ; S1.2@2499.84,2029.89 2369.79,2029.89 2369,2029.1 2240.09,2029.1 1949.1,2029.1 1806,1886 ; P4.4 2900,3690 2965,3690 2995,3720 2995,3764 2864,3895 D1.2 2500,4074 3006,4580 4020,4580 4020,4425 4120,4425 L1.2 4210,4515 5420,4515 L1.15 ; U4.4 2770,1475 2101.1,1475 ; CN1.2 2945,3200 3156,3200 3206,3250 U1.40 ; F1.3 3648,1510 3629,1491 2117.1,1491 2101.1,1475 ; 1806,1886 R1.1 1646.1,1690 C1.1 2101.1,1475
WR: L1.5 U1.16 | length 4037.7
  Top Layer w10: U1.16 3104,1750 3237,1883 3237,4185 3682,4630 4305,4630 L1.5
pads on no net: 17B.3 17B.4 17B.5 17B.6 17B.7 17B.8 17B.13 17B.14 BLT.1 BLT.6 S11.2 S12.2 S13.2 S14.2 sw1.1 sw1.2 sw1.3 sw1.5 U1.27 U1.29 U1.30 U1.31
copper on no net: | length 4053.2
  Top Layer w10: 3635,1950 3715,1950 4470,1195 5225,1195 5260,1230 5260,1775 5326.11,1841.11 5405.09,1841.11 ; 3640,1945 3645,1945 ; 6525.09,1841.11 6784.05,1841.11 6784.84,1841.89
  Bottom Layer w10: 5405.09,1841.11 5664.05,1841.11 6038.97,1841.11 6409.05,1841.11 ; 6409.84,1841.89 6524.3,1841.89
  other v2: 1080,1085 6910,1085 6915,4620 1075,4625

## Keep-outs
Keep-Out Layer:
  lines w10: 1000,1005 1005,1000 6990,1000 6995,1005 6995,4705 1000,4705 1000,1005

## Silkscreen, mask and mechanical layers (free items; w line width, h text height)
Top Overlay:
  text "Muti-function student machine" at 1080,4460 h60
  text "Xue Ming" at 1620,4190 h60
  text "vcc/GND" at 2640,3975 h60

## Text inside footprints (layer, text, board x,y; h text height)
C1: Top Overlay "+" at 1834.45,1325.47 h59.06